# Altium PCB PCB.PcbDoc
Units mm, origin at the board's own origin, x right, y up, seen from the top; angles counter-clockwise.
Board outline 58 x 28 mm, 2 copper layers (Top Layer, Bottom Layer); 24 components, 14 nets, 57 pads, 0 vias.
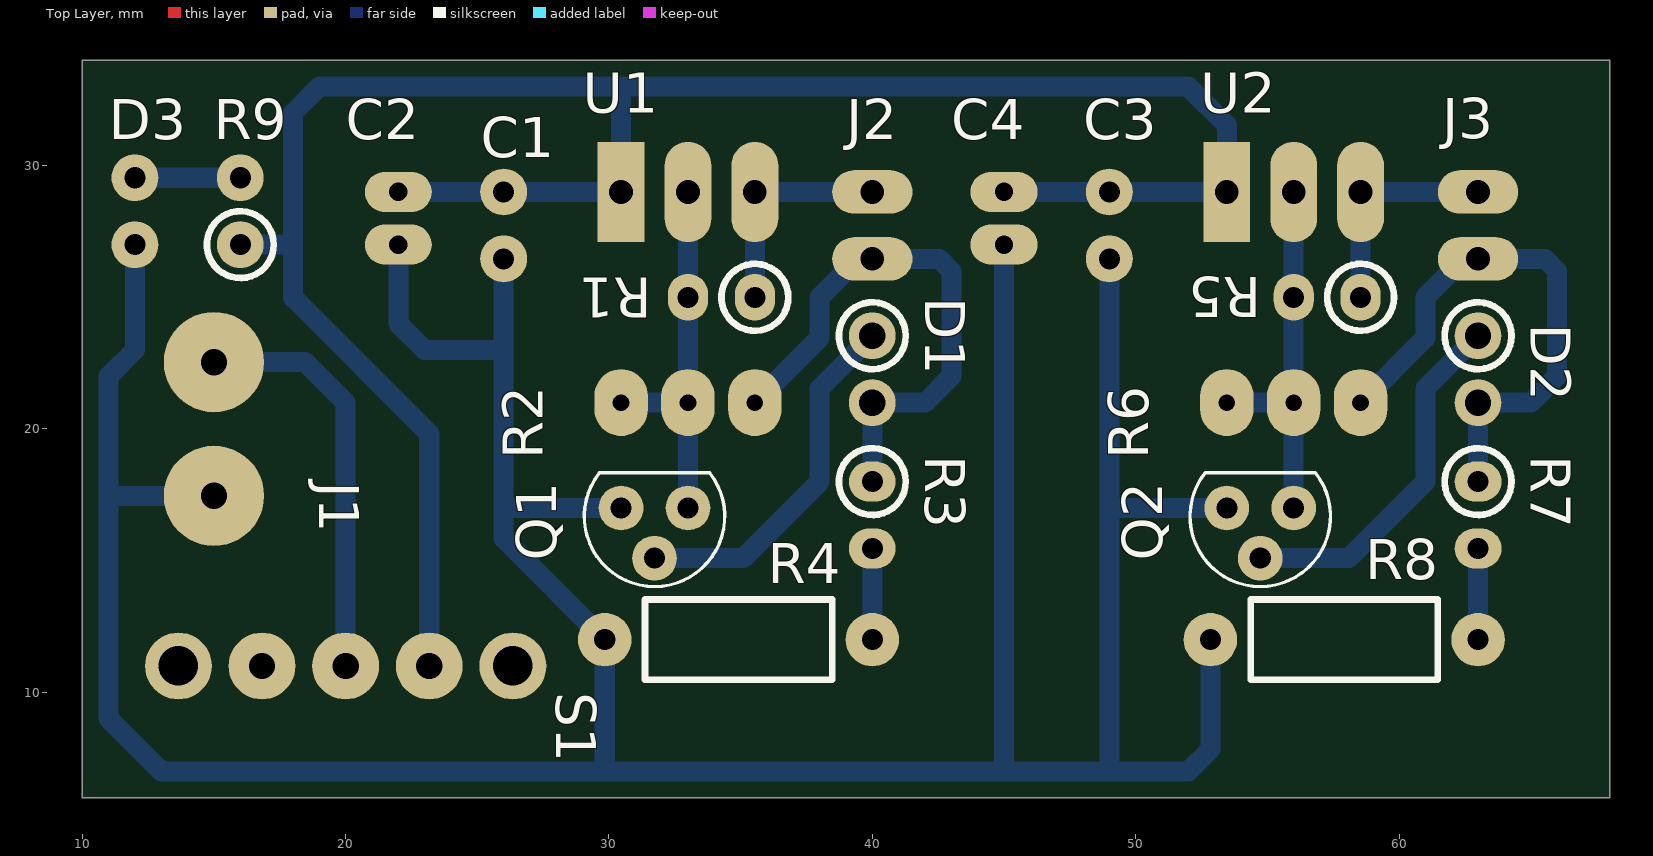
[diagram p0: Top Layer view]
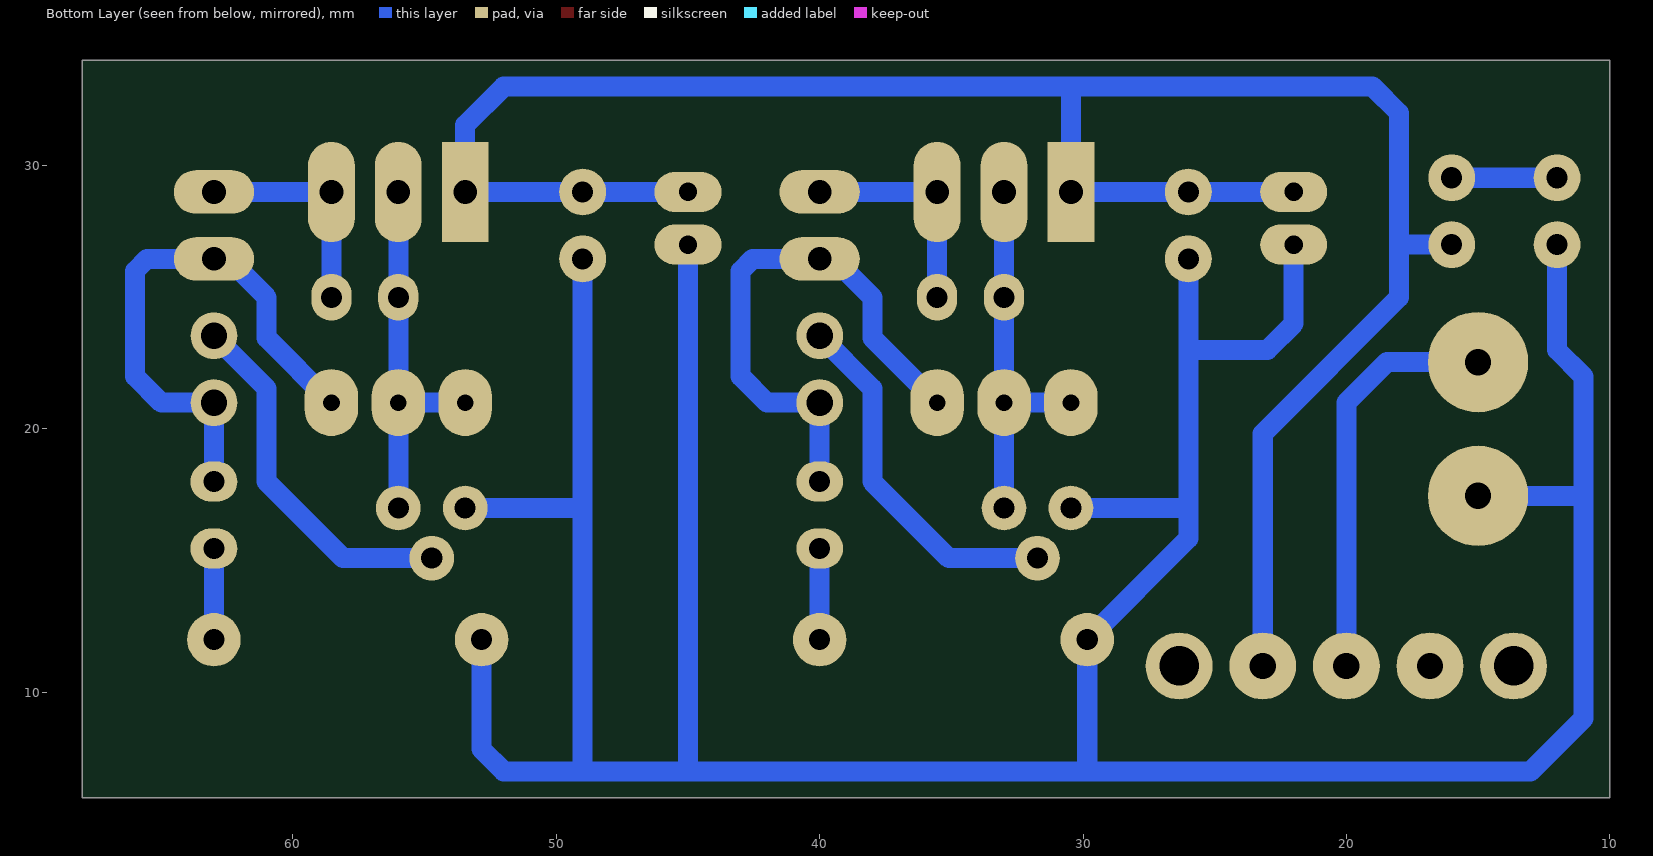
[diagram p1: Bottom Layer view, seen from below]
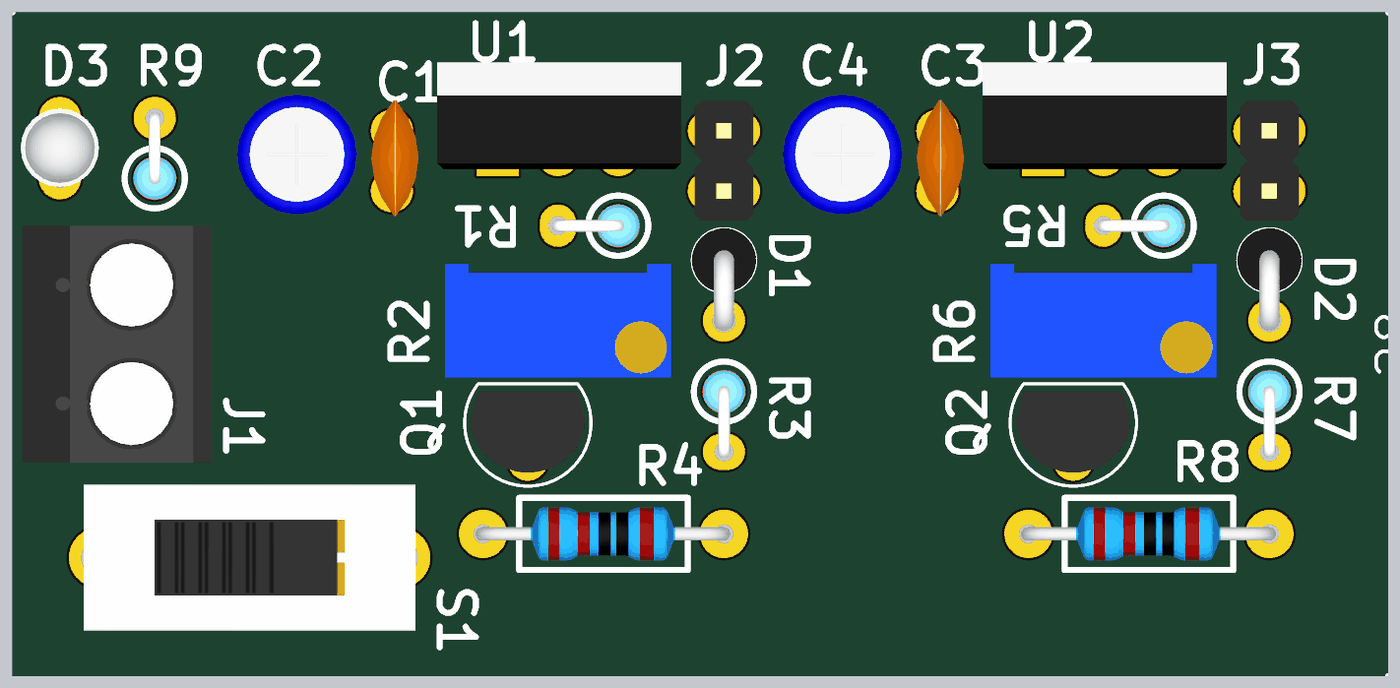
[diagram p2: 3D render of the assembled board from above, using the file's embedded part models]

## Layer stack, top to bottom
Top Solder: solder mask 0.0102, Solder Resist, Dk 3.5
Top Layer: signal copper 0.0356
Dielectric 1: dielectric 0.32, FR-4, Dk 4.8
Bottom Layer: signal copper 0.0356
Bottom Solder: solder mask 0.0102, Solder Resist, Dk 3.5

## Board outline
10,6 10,34 68,34 68,6

## Design rules (kind name [scope] priority, off if disabled: settings)
Clearance [All] p1: gap=0.254
PolygonConnect [All] p1: connectstyle=Relief reliefconductorwidth=0.254 reliefentries=4 polygonreliefangle="90 Angle" airgapwidth=0.254
RoutingVias [All] p1: holewidth=0.711 width=1.27 viastyle="Through Hole" minholewidth=0.711 minwidth=1.27 maxholewidth=0.711 maxwidth=1.27
SolderMaskExpansion [All] p1: expansion=0.102
Width [All] p1: maxlimit=0.762 minlimit=0.762 preferedwidth=0.762
30 further rules are at their usual default settings.

## Components (designator, comment, footprint, x,y, rotation, side; value= is the part's Value field where it differs from the comment)
C1 "CAP-CER" CAP-CER 26,28.111 r90 top
C2 "CAP-ELEC" CAP-ELEC-5X11X2MM 22,28 r270 top
C3 "CAP-CER" CAP-CER 49,28.111 r90 top
C4 "CAP-ELEC" CAP-ELEC-5X11X2MM 45,28 r270 top
D1 "1N4007" "DO-41 VERTICAL" 40,22.27 r90 top
D2 "1N4007" "DO-41 VERTICAL" 63,22.27 r90 top
D3 "LED" LED-3MM-RED 12,28.27 r270 top
J1 "2-BLOCK_TERMINAL" BLOCK_TERMINAL-2 15,20 r0 top
J2 "Bat1" "HEADER 1X2" 40,27.73 r0 top
J3 "Bat2" "HEADER 1X2" 63,27.73 r0 top
Q1 "BC547" TO-92 31.73,16.047 r180 top
Q2 "BC547" TO-92 54.73,16.047 r180 top
R1 "RES" "RES VERTICAL"#1 34.27,25 r0 top
R2 "POT" TRIMPOT 33,21 r180 top
R3 "RES" "RES VERTICAL"#1 40,16.73 r90 top
R4 "RES" RES-Axial-400mil 29.84,12 r0 top
R5 "RES" "RES VERTICAL"#1 57.27,25 r0 top
R6 "POT" TRIMPOT 56,21 r180 top
R7 "RES" "RES VERTICAL"#1 63,16.73 r90 top
R8 "RES" RES-AXIAL-400MIL 52.84,12 r0 top
R9 "RES" "RES VERTICAL"#2 16,28.27 r270 top
S1 "SLIDE-SWITCH" SWITCH 20,11 r180 top
U1 "LM317T" TO-220 30.46,29 r90 top
U2 "LM317T" TO-220 53.46,29 r90 top

## Footprints (in the part's own frame and the unit in brackets; to place one, negate y for a bottom-side part, rotate by r counter-clockwise, add the part's x,y. Pads: shape width x height; smd on the part's side, far side on the other; paste and mask are expansions set on the pad)
BLOCK_TERMINAL-2 [mm]
  round 3.81 hole 1: 1(0,2.54) 2(0,-2.54)
  body extent -4.57,-5 3.43,5, height 10.16
CAP-CER [mil]
  round 70 hole 31.5: 1(-65,0) 2(35,0)
  body extent -107,-44 87,34, height 207
CAP-ELEC-5X11X2MM [mm]
  oval 1.524x2.54 hole 0.7: 1(-1,0) 2(1,0)
  body extent -2.53,-2.53 2.52,2.53, height 11.53
"DO-41 VERTICAL" [mil]
  round 70 hole 39.37: A(-50,0) K(50,0)
  silkscreen extent 0,-50 100,50, body extent -67,-53 103,54, height 379
"HEADER 1X2" [mil]
  oval 120x65 hole 35.43: 1(0,50) 2(0,-50)
  body extent -49,-100 49,100, height 336
LED-3MM-RED [mil]
  round 70 hole 31.5: A(-50,0) K(50,0)
  body extent -66,-65 64,65, height 217
"RES VERTICAL"#1 [mil]
  oval 60x70 hole 31.5: 1(-50,0) 2(50,0)
  silkscreen extent 0,-50 100,50, body extent -60,-36 86,36, height 267
"RES VERTICAL"#2 [mil]
  round 70 hole 31.5: 1(-50,0) 2(50,0)
  silkscreen extent 0,-50 100,50, body extent -60,-36 86,36, height 267
RES-Axial-400mil [mil]
  round 80 hole 31.5: 1(0,0) 2(400,0)
  silkscreen extent 60,-60 340,60, body extent -12,-44 410,44, height 94
RES-AXIAL-400MIL [mil]
  round 80 hole 31.5: 1(0,0) 2(400,0)
  silkscreen extent 60,-60 340,60, body extent -12,-44 410,44, height 94
SWITCH [mm]
  round 2.54 hole 1: 1(-3.175,0) 2(0,0) 3(3.175,0)
  round 2.54 hole 1.5: 4(-6.35,0) 4(6.35,0)
  body extent -7,-3.1 7,3.1, height 9.65
TO-92 [mm]
  round 1.7 hole 0.8: B(0,0.953) C(-1.27,-0.953) E(1.27,-0.952)
  silkscreen extent -2.67,-2.29 2.67,2.03, body extent -2.41,-1.97 2.41,1.46, height 7.37
TO-220 [mm]
  rect 3.81x1.778 hole 0.9: 1(0,0)
  oval 3.81x1.778 hole 0.9: 2(0,-2.54) 3(0,-5.08)
  body extent -1.61,-7.75 2.88,2.55, height 16.8
TRIMPOT [mil]
  oval 80x100 hole 25: 1(-100,0) 2(0,0) 3(100,0)
  body extent -188,-94 188,94, height 455

## Part data
D1 D2: library part DIODE
J2 J3: library part "Header 1x2"
Q1 Q2: library part NPN
U1 U2: library part LM317

## Nets (pads, with @x,y where several pads share a name; then routed paths per layer and width w, separated by ;. In a path a pad name is that pad's centre, name@x,y a point inside that pad or via, vN(x,y) a via of type N, cw(c..) or ccw(c..) an arc to the next point about the centre after c; other vN are vias at no path point)
BAT: C1.2 C2.1 C3.2 C4.1 R9.2 S1.1 U1.1 U2.1 | length 85.1
  Bottom Layer w0.762: R9.2 18,27 ; C2.1 C1.2 U1.1 30.46,33 ; S1.1 23.175,19.825 18,25 18,27 ; C4.1 C3.2 U2.1 53.46,31.54 52,33 30.46,33 ; 18,27 18,32 19,33 30.46,33
GND: C1.1 C2.2 C3.1 C4.2 D3.K J1.2 Q1.E Q2.E R4.1 R8.1 | length 146.4
  Bottom Layer w0.762: D3.K 12,23 11,22 11,17.46 ; J1.2 11,17.46 ; C2.2 22,24 23,23 26,23 ; C1.1 26,23 ; Q1.E 26,17 ; C4.2 45,7 ; C3.1 49,17 ; R8.1 52.84,7.84 52,7 49,7 ; Q2.E 49,17 ; 11,17.46 11,9 13,7 29.84,7 ; 26,17 26,23 ; 26,17 26,15.84 R4.1 29.84,7 ; 29.84,7 45,7 ; 45,7 49,7 ; 49,7 49,17
NetD1_A: D1.A J2.2 R2.1 R3.2 | length 21.2
  Bottom Layer w0.762: R2.1 38,23.46 38,25 39.46,26.46 J2.2 42.54,26.46 43,26 43,22 42,21 D1.A R3.2
NetD1_K: D1.K Q1.B | length 13.8
  Bottom Layer w0.762: Q1.B 35.095,15.095 38,18 38,21.54 D1.K
NetD2_A: D2.A J3.2 R6.1 R7.2 | length 21.2
  Bottom Layer w0.762: R6.1 61,23.46 61,25 62.46,26.46 J3.2 65.54,26.46 66,26 66,22 65,21 D2.A R7.2
NetD2_K: D2.K Q2.B | length 13.8
  Bottom Layer w0.762: Q2.B 58.095,15.095 61,18 61,21.54 D2.K
NetD3_A: D3.A R9.1 | length 4
  Bottom Layer w0.762: D3.A R9.1
NetJ1_1: J1.1 S1.2 | length 15.6
  Bottom Layer w0.762: J1.1 18.46,22.54 20,21 S1.2
NetJ2_1: J2.1 R1.2 U1.3 | length 8.5
  Bottom Layer w0.762: R1.2 U1.3 J2.1
NetJ3_1: J3.1 R5.2 U2.3 | length 8.5
  Bottom Layer w0.762: R5.2 U2.3 J3.1
NetQ1_C: Q1.C R1.1 R2.2 R2.3 U1.2 | length 14.5
  Bottom Layer w0.762: R2.3 R2.2 ; Q1.C R2.2 ; U1.2 R1.1 R2.2
NetQ2_C: Q2.C R5.1 R6.2 R6.3 U2.2 | length 14.5
  Bottom Layer w0.762: R6.3 R6.2 ; Q2.C R6.2 ; U2.2 R5.1 R6.2
NetR3_1: R3.1 R4.2 | length 3.5
  Bottom Layer w0.762: R4.2 R3.1
NetR7_1: R7.1 R8.2 | length 3.5
  Bottom Layer w0.762: R8.2 R7.1
pads on no net: S1.3 S1.4

## Silkscreen, mask and mechanical layers (free items; w line width, h text height)
Mechanical 1:
  the board outline again, w0.254

## Dimensions
68,34 to 68,6 on Top Overlay
10,34 to 68,34 on Top Overlay